# Altium PCB PCB_Business_Card.PcbDoc
Units mm, origin at the board's own origin, x right, y up, seen from the top; angles counter-clockwise.
Board outline 85.6 x 54 mm, 2 copper layers (Top Layer, Bottom Layer); 7 components, 7 nets, 20 pads, 1 vias.
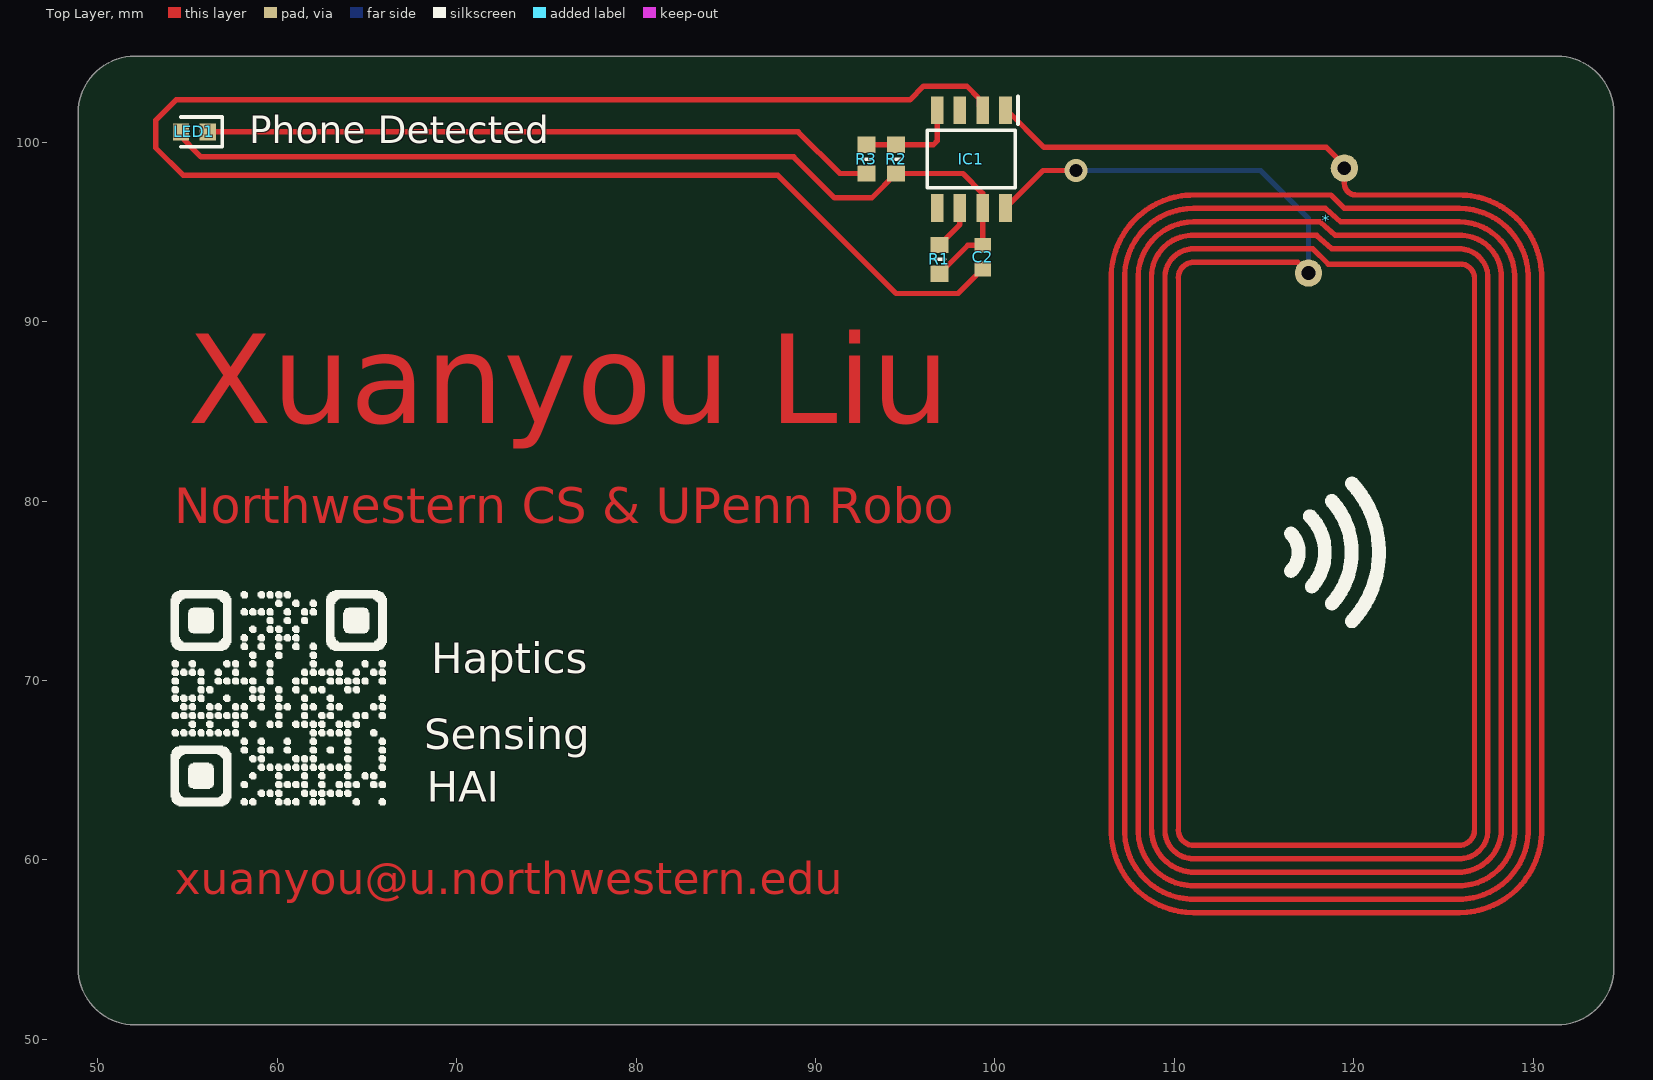
[diagram p0: Top Layer view]
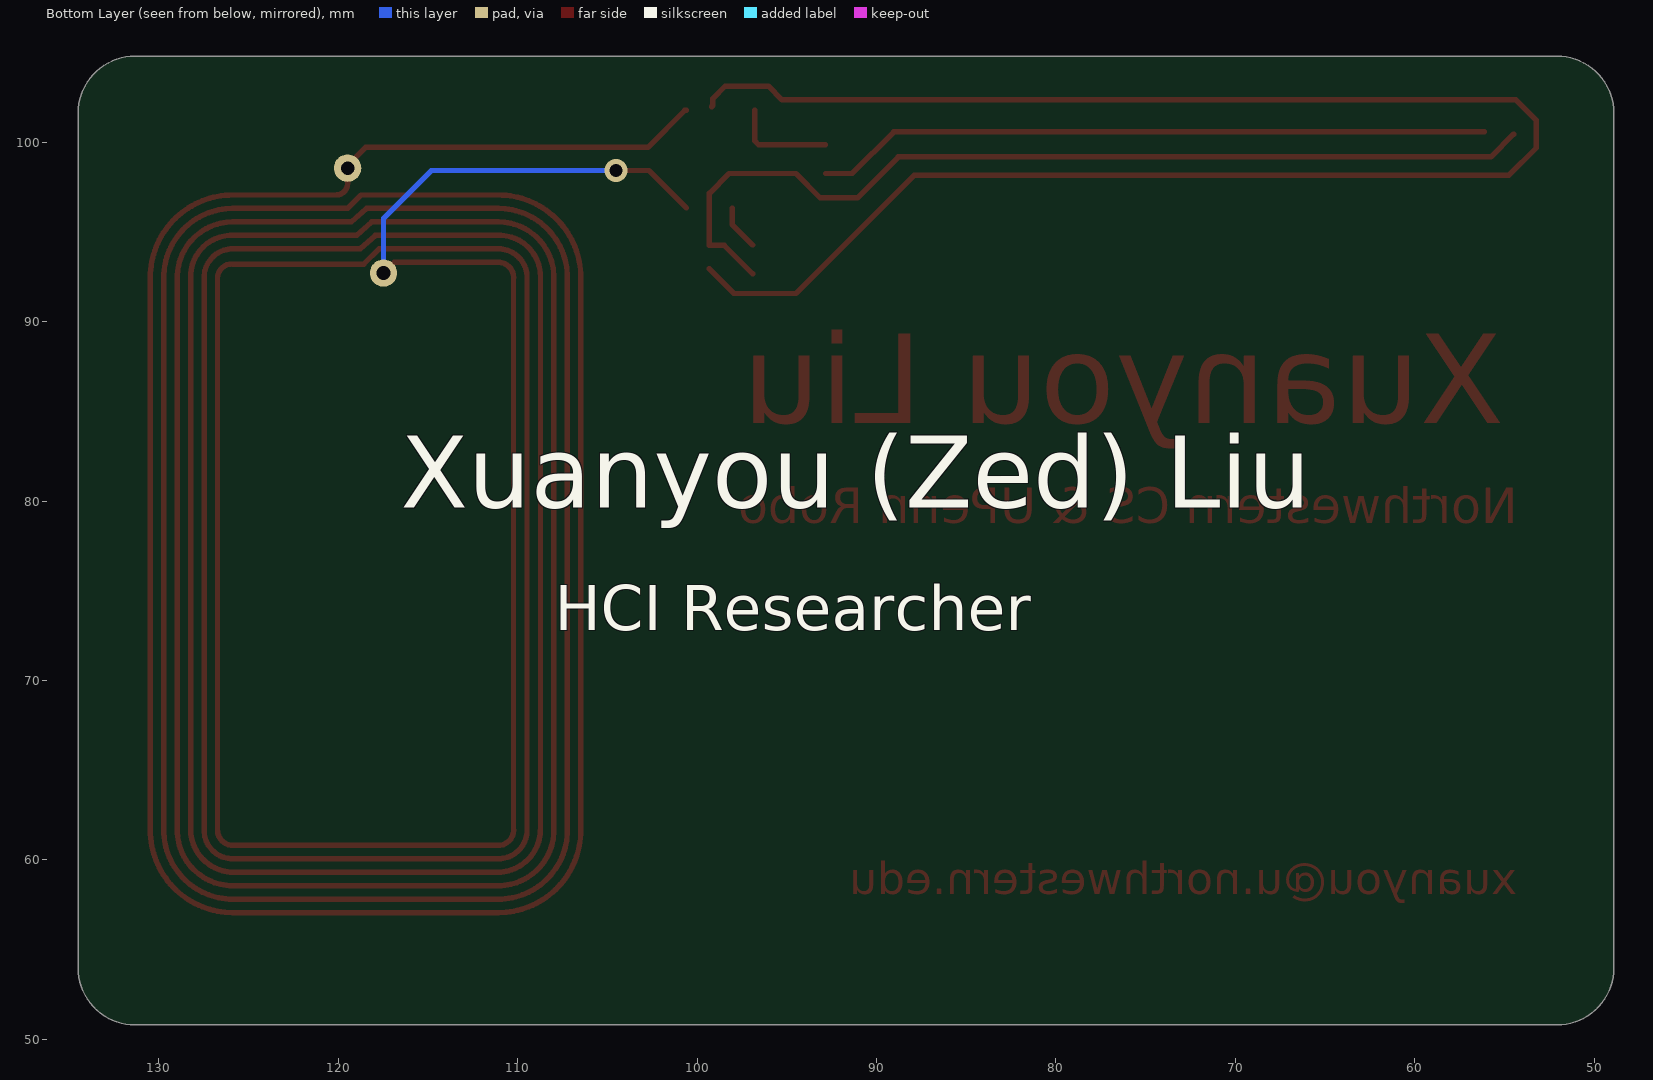
[diagram p1: Bottom Layer view, seen from below]

## Layer stack, top to bottom
Top Solder: solder mask 0.0102, Solder Resist, Dk 3.5
Top Layer: signal copper 0.0356
Dielectric 1: dielectric 0.32, FR-4, Dk 4.8
Bottom Layer: signal copper 0.0356
Bottom Solder: solder mask 0.0102, Solder Resist, Dk 3.5

## Board outline
48.895,53.98 48.895,101.62 cw(c52.075,101.62) 52.075,104.8 131.315,104.8 cw(c131.315,101.62) 134.495,101.62 134.495,53.98 cw(c131.315,53.98) 131.315,50.8 52.075,50.8 cw(c52.075,53.98)

## Design rules (kind name [scope] priority, off if disabled: settings)
BoardOutlineClearance [All] p1: gap=0.2 ignorepadtopadclearanceinfootprint=FALSE
Clearance [All] p1: gap=0.127 ignorepadtopadclearanceinfootprint=FALSE except(0.25: Arc-Hole Track-Hole SMDPad-Hole THPad-Hole Via-Hole Fill-Hole Poly-Hole Region-Hole Text-Hole)
ComponentClearance [All] p1: gap=0.127 collisioncheckmode=3 verticalgap=0.127 showdistances=TRUE
DiffPairsRouting [All] p1: maxlimit=0.254 minlimit=0.127 mostfreqgap=0.127 toplayer_minwidth=0.127 toplayer_maxwidth=25.4 toplayer_prefwidth=0.127 bottomlayer_minwidth=0.127 bottomlayer_maxwidth=25.4 bottomlayer_prefwidth=0.127 maxuncoupledlength=12.7
Height [All] p1: minheight=0 maxheight=1816.048 prefheight=12.7
HoleSize [All] p1: absolutevalues=TRUE maxlimit=6.3 minlimit=0.3 maxpercent=80.000 minpercent=20.000
HoleToHoleClearance [All] p1: gap=0.25 allowstackedmicrovias=FALSE
MinimumAnnularRing [All] p1: minimumring=0.076
MinimumSolderMaskSliver [All] p1: minsoldermaskwidth=0
PlaneClearance [All] p1: clearance=0.127
PlaneConnect PlaneConnectPowerPads [InPadClass('PowerPads')] p1: planeconnectstyle=Direct reliefexpansion=0.508 reliefentries=4 reliefconductorwidth=0.254 reliefairgap=0.254
PlaneConnect [All] p2: pad.planeconnectstyle=Relief pad.reliefexpansion=0.3 pad.reliefentries=4 pad.reliefconductorwidth=0.127 pad.reliefairgap=0.127 via.planeconnectstyle=Direct via.reliefexpansion=0.3 via.reliefentries=4 via.reliefconductorwidth=0.127 via.reliefairgap=0.127
PolygonConnect PolygonConnectPowerPads [All vs (InPadClass('PowerPads'))] p1: connectstyle=Direct reliefconductorwidth=0.254 reliefentries=4 polygonreliefangle="90 Angle" airgapwidth=0.254
PolygonConnect [All] p2: thpad.connectstyle=Relief thpad.reliefconductorwidth=0.127 thpad.reliefentries=4 thpad.polygonreliefangle="90 Angle" thpad.airgapwidth=0.127 smdpad.connectstyle=Relief smdpad.reliefconductorwidth=0.127 smdpad.reliefentries=4 smdpad.polygonreliefangle="90 Angle" smdpad.airgapwidth=0.127 via.connectstyle=Direct via.reliefconductorwidth=0.127 via.reliefentries=4 via.polygonreliefangle="90 Angle" via.airgapwidth=0.127
RoutingVias [All] p1: holewidth=0.3 width=0.6 viastyle="Through Hole" minholewidth=0.3 minwidth=0.6 maxholewidth=0.6 maxwidth=6.6
SilkToSilkClearance [All] p1: silktosilkclearance=0
SilkToSolderMaskClearance [IsPad] p1: minsilkscreentomaskgap=0.127 clearancetoexposedcopper=TRUE
SolderMaskExpansion [All] p1: expansion=0.075 istentingtop=FALSE
SupplyNets "Schematic Supply Nets" [InNet('GND')] p1: voltage=0.000
Width [All] p1: maxlimit=25.4 minlimit=0.127 preferedwidth=0.127 minimp=50.000000 maximp=50.000000 favimp=50.000000
20 further rules are at their usual default settings.

## Components (designator, comment, footprint, x,y, rotation, side; value= is the part's Value field where it differs from the comment)
* "Attena" "PCBComponent_1 - duplicate" -1139.375,-1171.29 r180 top locked
C2 "150nF" CAPC1608X90N 99.314,93.599 r90 top
IC1 "NT3H2111W0FT1" SOIC127P600X175-8N 98.679,99.06 r270 top
LED1 "KT-0603R" LEDC1608X70N 55.372,100.584 r180 top
R1 "0ohm" RESC1608X55N 96.901,93.472 r270 top
R2 "100K ohm" RESC1608X55N 94.488,99.06 r270 top
R3 "2.7k ohm" RESC1608X55N 92.837,99.06 r270 top

## Footprints (in the part's own frame and the unit in brackets; to place one, negate y for a bottom-side part, rotate by r counter-clockwise, add the part's x,y. Pads: shape width x height; smd on the part's side, far side on the other; paste and mask are expansions set on the pad)
CAPC1608X90N [mm]
  rect 0.83x0.94 smd: 1(-0.66,0) 2(0.66,0)
  body extent -0.85,-0.45 0.85,0.45, height 0.9
LEDC1608X70N [mm]
  rect 0.9x0.95 smd: 1(-0.75,0) 2(0.75,0)
  silkscreen extent -1.55,-0.82 0.75,0.82, body extent -0.8,-0.42 0.8,0.38, height 0.8
"PCBComponent_1 - duplicate" [mil]
  round 60 hole 30 mask+0: 0(-49561.09,-49994.09) 1(-49482.3,-49763.8)
  Top Layer drawing of 662 lines, arcs and shapes, not listed
RESC1608X55N [mm]
  rect 0.9x1 smd: 1(-0.8,0) 2(0.8,0)
  silkscreen extent 0,-0.3 0,0.3, body extent -0.8,-0.4 0.8,0.4, height 0.55
SOIC127P600X175-8N [mm]
  rect 1.55x0.7 smd: 1(-2.725,1.905) 2(-2.725,0.635) 3(-2.725,-0.635) 4(-2.725,-1.905) 5(2.725,-1.905) 6(2.725,-0.635) 7(2.725,0.635) 8(2.725,1.905)
  silkscreen extent -3.5,-2.45 1.6,2.61, body extent -3,-2.45 3,2.45, height 1.52

## Part data
C2: library part CC0603KRX7R7BB154, "Capacitor", Manufacturer_Name="Yageo Group", Mouser Part Number=603-CC603KRX7R7BB154, Arrow Part Number=CC0603KRX7R7BB154, Arrow Price/Stock=https://www.arrow.com/en/products/cc0603krx7r7bb154/yageo, Datasheet Link=https://www.yageo.com/upload/media/product/productsearch/datasheet/mlcc/UPY-NP0X7R_MV_100-to-630V_24.pdf, Height=0.9mm, Manufacturer_Part_Number=CC0603KRX7R7BB154, Mouser Price/Stock=https://www.mouser.com/Search/Refine.aspx?Keyword=603-CC603KRX7R7BB154
IC1: "Integrated Circuit", Manufacturer_Name=NXP, Datasheet Link=https://www.nxp.com/docs/en/data-sheet/NT3H2111_2211.pdf, Height=1.75mm, Manufacturer_Part_Number=NT3H2111W0FT1
LED1: "LED", Manufacturer_Name="Hubei KENTO Elec", Datasheet Link=https://datasheet.lcsc.com/szlcsc/Hubei-KENTO-Elec-KT-0603R_C2286.pdf, Height=0.7mm, Manufacturer_Part_Number=KT-0603R
R1: library part 0603WAJ0000T5E, "Resistor", Manufacturer_Name=ROYALOHM, Mouser Part Number=303-0603WAJ0000T5E, Datasheet Link=https://datasheet.lcsc.com/lcsc/2110260030_UNI-ROYAL-Uniroyal-Elec-0603WAF4702T5E_C25819.pdf, Height=0.55mm, Manufacturer_Part_Number=0603WAJ0000T5E, Mouser Price/Stock=https://www.mouser.co.uk/ProductDetail/Royalohm/0603WAJ0000T5E?qs=e8oIoAS2J1T%252BUJj0iDaz%252BQ%3D%3D
R2: library part RC0603FR-07100KL, "Resistor", Manufacturer_Name="Yageo Group", Mouser Part Number=603-RC0603FR-07100KL, Arrow Part Number=RC0603FR-07100KL, Arrow Price/Stock=https://www.arrow.com/en/products/rc0603fr07100kl/yageo.html?utm_currency=USD&region=europe, Datasheet Link=https://www.yageo.com/upload/media/product/productsearch/datasheet/rchip/PYu-RC_Group_51_RoHS_L_12.pdf, Height=0.55mm, Manufacturer_Part_Number=RC0603FR-07100KL, Mouser Price/Stock=https://www.mouser.co.uk/ProductDetail/YAGEO/RC0603FR-07100KL?qs=e1ok2LiJcmaihem8Va5%2Fsw%3D%3D
R3: library part 0603WAF2701T5E, "Resistor", Manufacturer_Name="UNI-ROYAL(Uniroyal Elec)", Datasheet Link=https://datasheet.lcsc.com/szlcsc/Uniroyal-Elec-0603WAF2701T5E_C13167.pdf, Height=0.55mm, Manufacturer_Part_Number=0603WAF2701T5E

## Via types
v1: diameter 1.27, hole 0.711, Top Layer to Bottom Layer, tented both sides, 1 vias

## Nets (pads, with @x,y where several pads share a name; then routed paths per layer and width w, separated by ;. In a path a pad name is that pad's centre, name@x,y a point inside that pad or via, vN(x,y) a via of type N, cw(c..) or ccw(c..) an arc to the next point about the centre after c; other vN are vias at no path point)
GND: C2.1 IC1.2 | length 99
  Top Layer w0.3: IC1.2@99.187,101.981 99.114,102.054 99.114,102.435 98.425,103.124 96.012,103.124 95.25,102.362 54.356,102.362 53.213,101.219 53.213,99.695 54.737,98.171 87.884,98.171 94.488,91.567 97.942,91.567 C2.1
Net*_0: *.0 IC1.1 | length 20
  Top Layer w0.3: IC1.1 100.678,101.785 102.743,99.72 118.466,99.72 *.0@119.38,98.806
Net*_1: *.1 IC1.8 | length 21
  Top Layer w0.3: IC1.8 102.674,98.425 102.997,98.425 v1(104.521,98.425)
  Bottom Layer w0.3: v1@104.902,98.425 114.808,98.425 117.475,95.758 *.1@117.475,93.218
NetC2_2: C2.2 IC1.7 LED1.2 R1.2 R2.2 | length 53.3
  Top Layer w0.3: LED1.2@54.483,100.457 55.753,99.187 88.773,99.187 91.059,96.901 93.129,96.901 R2.2 98.209,98.26 99.314,97.155 IC1.7 C2.2 98.488,94.259 R1.2
NetIC1_4: IC1.4 R2.1 R3.1 | length 5.7
  Top Layer w0.3: R3.1 R2.1 96.558,99.86 96.774,100.076 IC1.4
NetIC1_6: IC1.6 R1.1 | length 2.5
  Top Layer w0.3: R1.1 98.044,95.415 IC1.6
NetLED1_1: LED1.1 R3.2 | length 37.7
  Top Layer w0.3: LED1.1 56.134,100.584 89.027,100.584 91.351,98.26 R3.2
pads on no net: IC1.3 IC1.5

## Other copper
Top Layer:
  text "Xuanyou Liu" at 55,84.327 h5
  text "Northwestern CS & UPenn Robo" at 54.255,78.777 h2
  text "xuanyou@u.northwestern.edu" at 54.291,58.09 h1.8

## Silkscreen, mask and mechanical layers (free items; w line width, h text height)
Top Overlay:
  drawing of 235 lines, arcs and shapes, not listed
  text "Phone Detected" at 58.42,99.949 h1.52
  text "Haptics" at 68.58,70.417 h1.7
  text "Sensing" at 68.199,66.167 h1.7
  text "HAI" at 68.326,63.246 h1.7
Bottom Overlay:
  text "Xuanyou (Zed) Liu" at 116.521,79.63 h4
  text "HCI Researcher" at 107.931,72.79 h2.5
Top Solder:
  text "Xuanyou Liu" at 55,84.327 h5
  text "Northwestern CS & UPenn Robo" at 54.3,78.786 h2
  text "xuanyou@u.northwestern.edu" at 54.3,58.05 h1.8
Mechanical 1:
  the board outline again, w0.254